# EAGLE board Spectrum_Shield-Panel-v15 (EAGLE 6.6.0), part 1 of 2
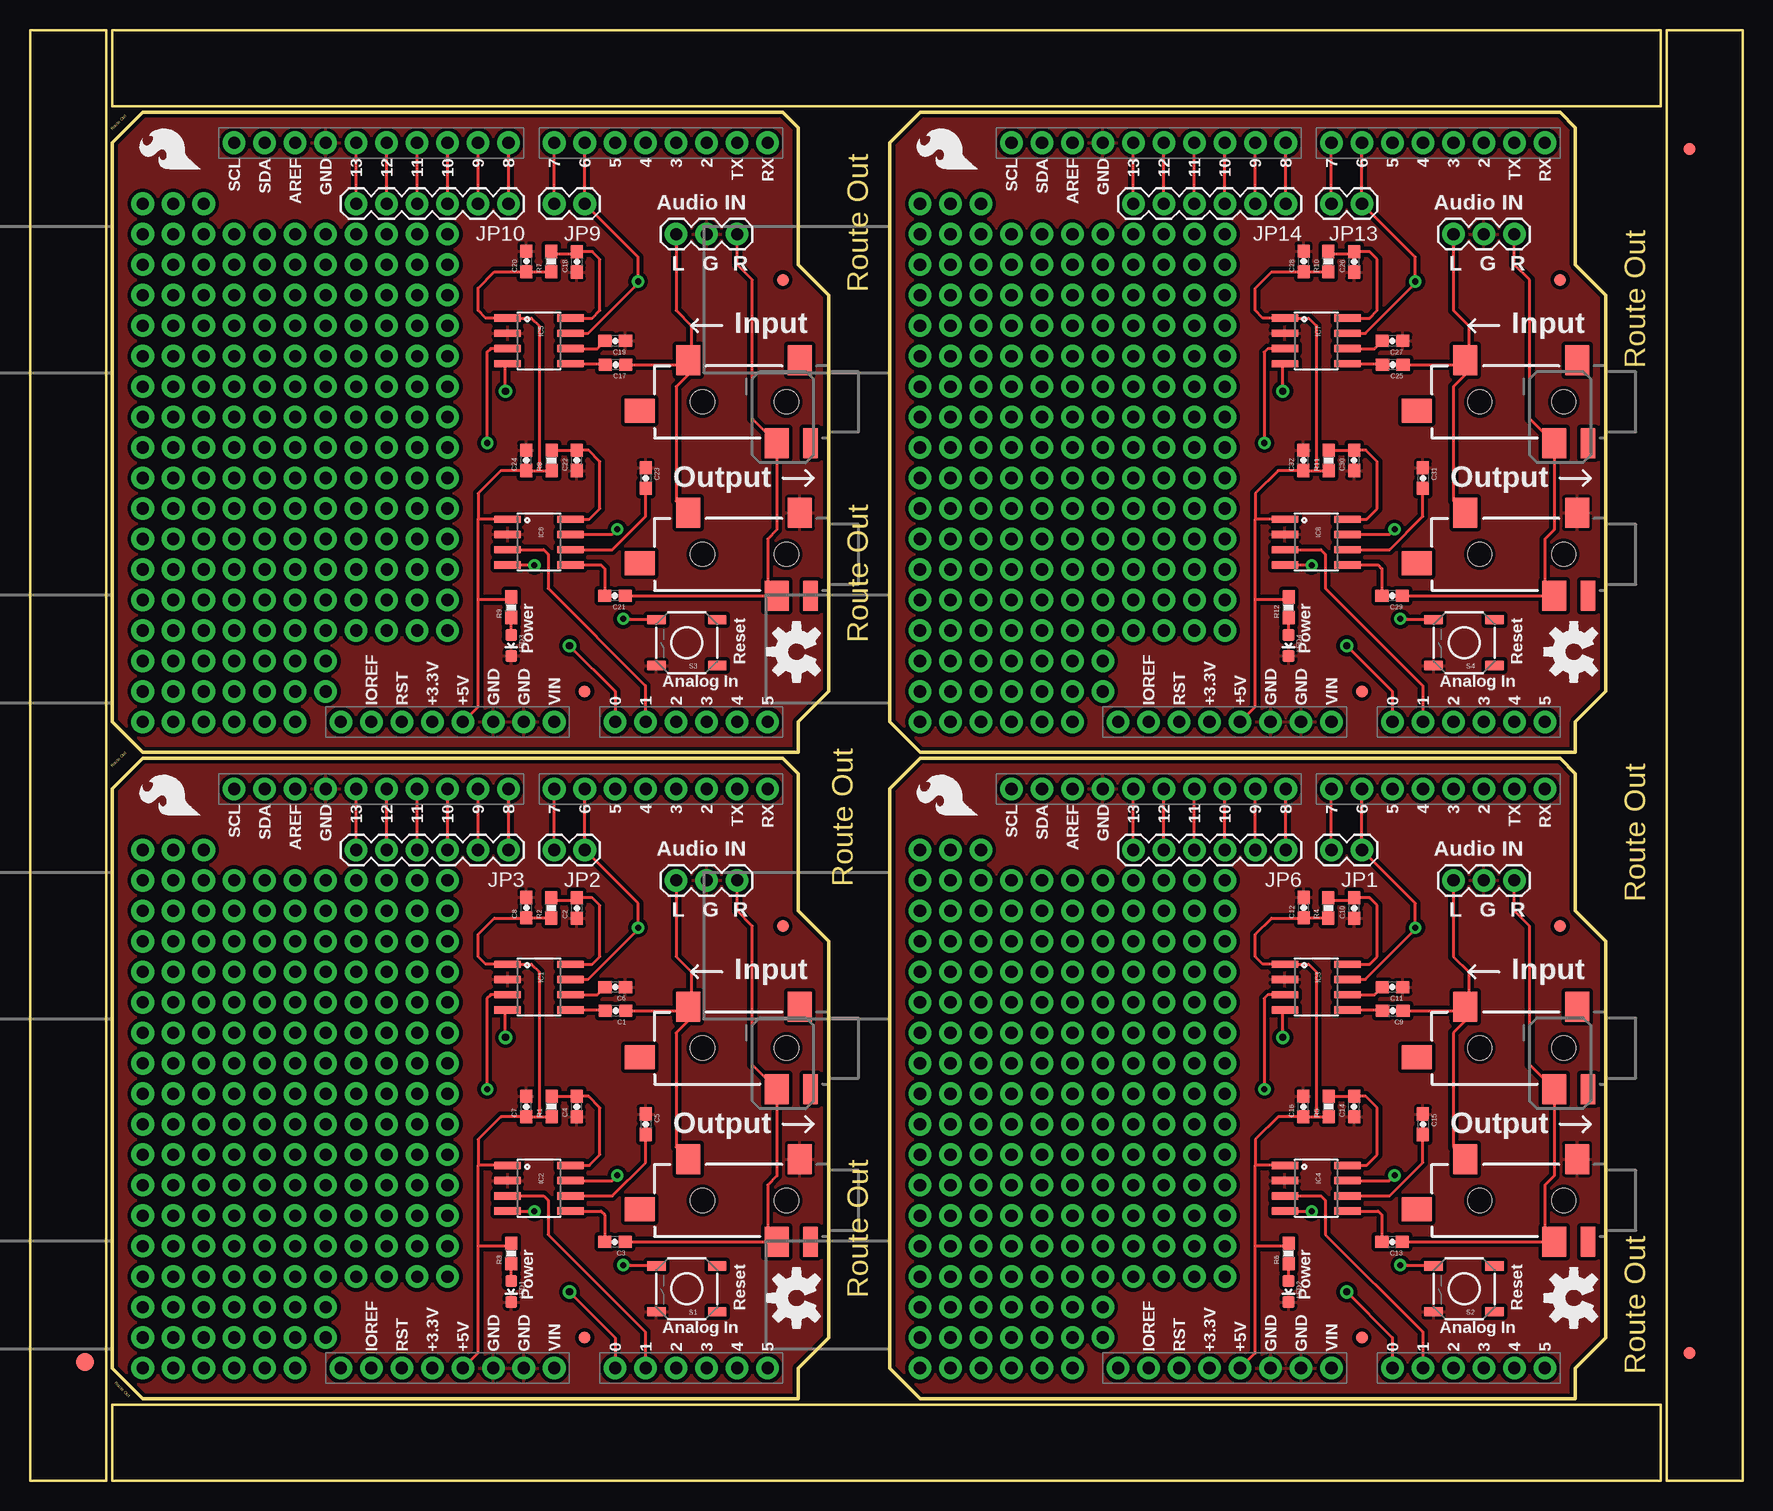
[diagram p0: board, top side]
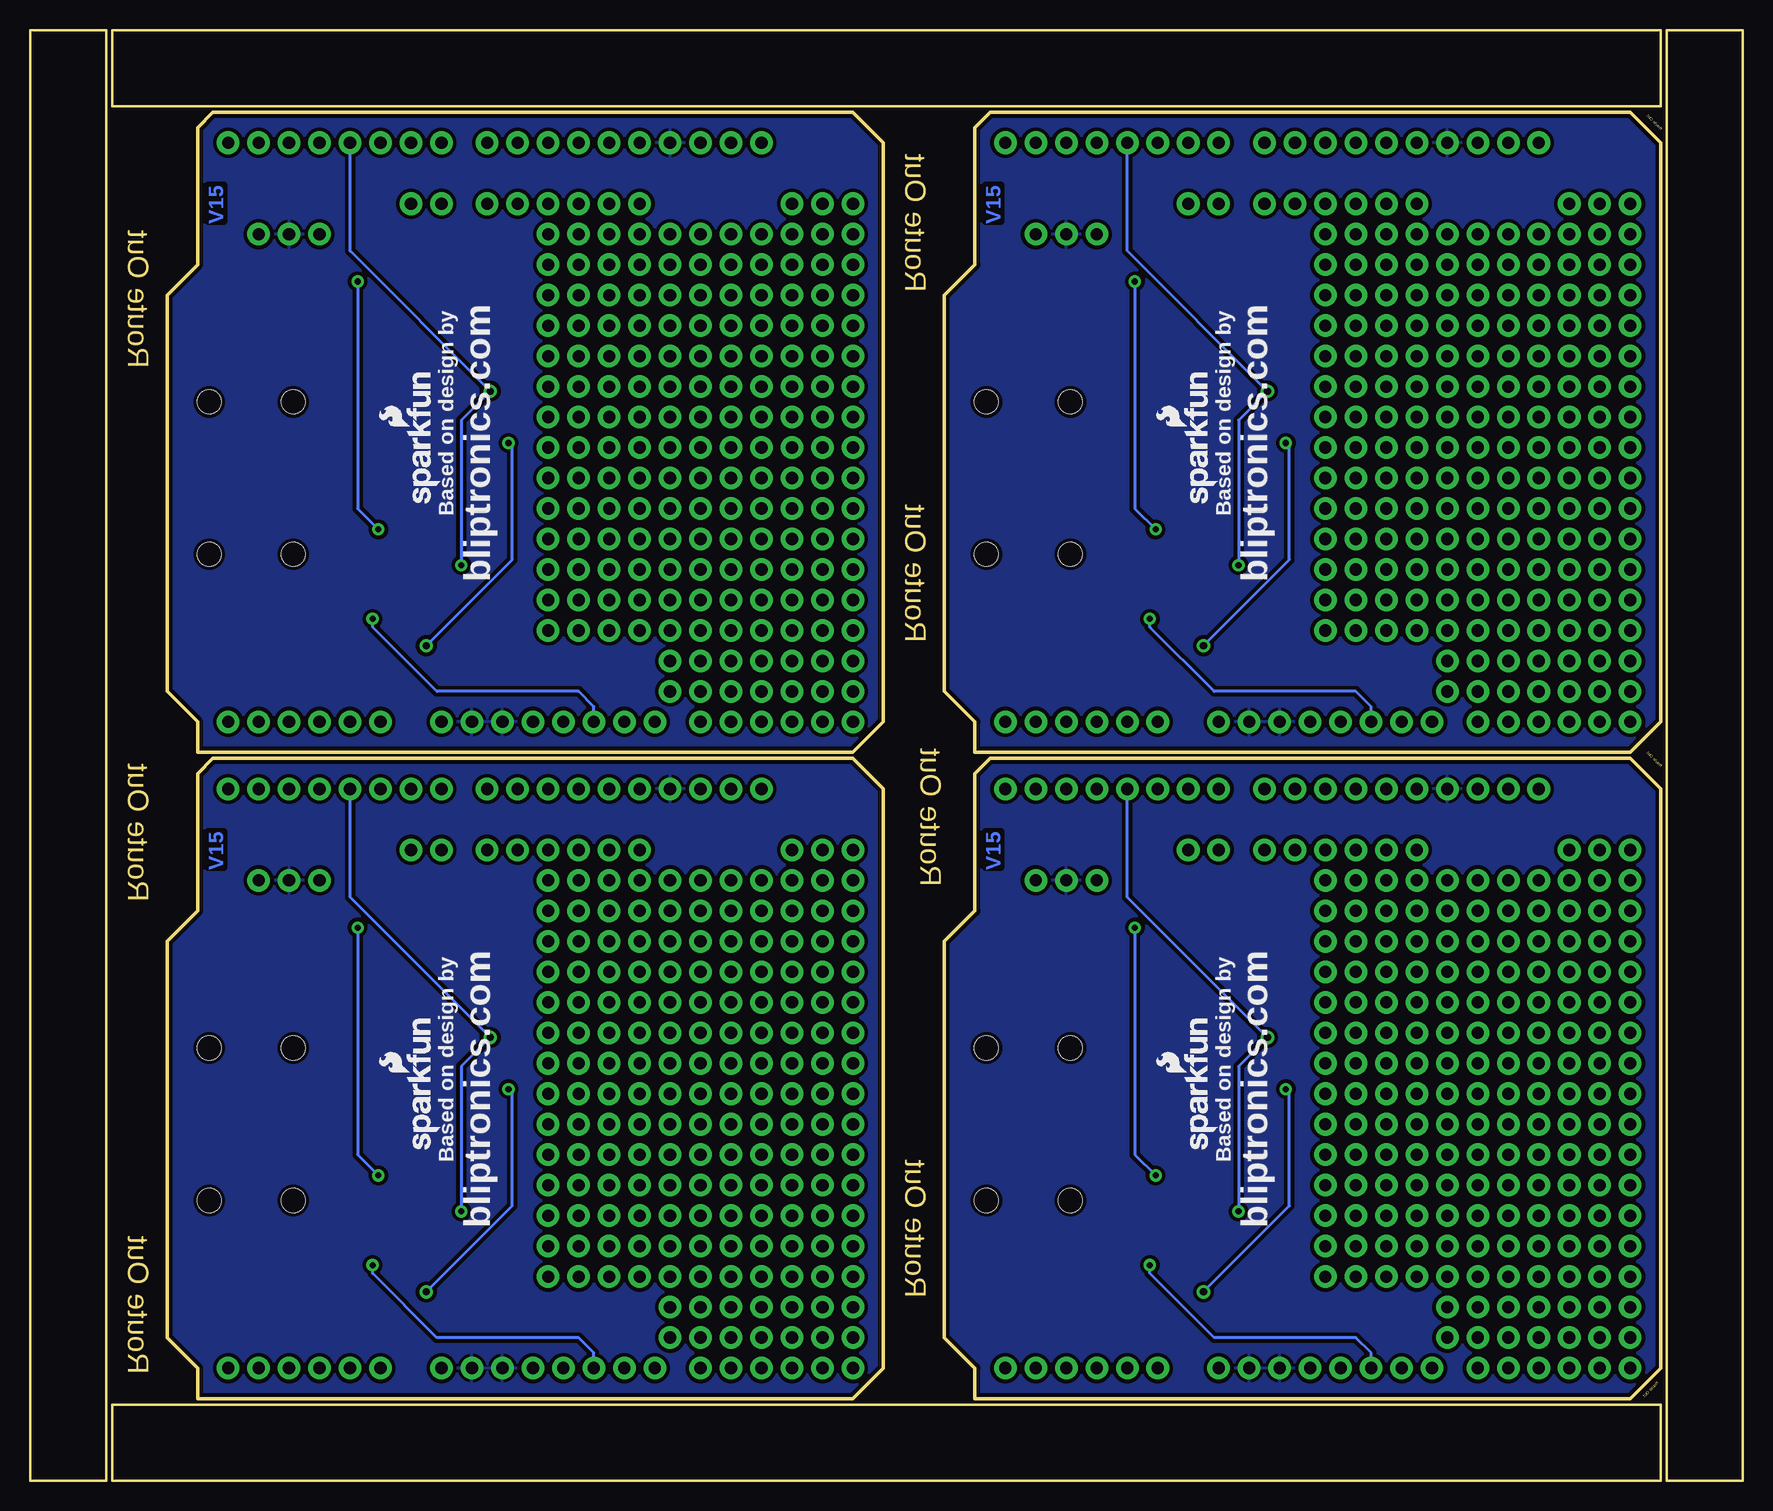
[diagram p1: board, bottom side, seen from below]

Size 142.75 x 120.9 mm. Coordinates in mm from the lower left corner, seen from the top.
Outline: 142.75,72.9 142.75,0 136.4,0 136.4,23.37
Outline: 136.4,22.1 136.4,120.9 142.75,120.9 142.75,71.63
Outline: 9.4,6.86 64.01,6.86 64.01,9.4 66.55,11.94 66.55,44.96 64.01,47.5 64.01,58.93 62.74,60.2 9.4,60.2 6.86,57.66 6.86,9.4 9.4,6.86
Outline: 74.17,6.86 128.78,6.86 128.78,9.4 131.32,11.94 131.32,44.96 128.78,47.5 128.78,58.93 127.51,60.2 74.17,60.2 71.63,57.66 71.63,9.4 74.17,6.86
Outline: 9.4,60.71 64.01,60.71 64.01,63.25 66.55,65.79 66.55,98.81 64.01,101.35 64.01,112.78 62.74,114.05 9.4,114.05 6.86,111.51 6.86,63.25 9.4,60.71
Outline: 74.17,60.71 128.78,60.71 128.78,63.25 131.32,65.79 131.32,98.81 128.78,101.35 128.78,112.78 127.51,114.05 74.17,114.05 71.63,111.51 71.63,63.25 74.17,60.71
Outline: 6.35,0 6.35,120.9 0,120.9 0,0 6.35,0
Outline: 6.86,0 135.89,0 135.89,6.35 6.86,6.35 6.86,0
Outline: 135.89,120.9 6.86,120.9 6.86,114.55 135.89,114.55 135.89,120.9
Copper layers (1*16): Top 0.035mm / dielectric 1.5mm / Bottom 0.035mm
Design rules "SparkFun-2-layer": minimum track width 7mil, minimum drill 15mil, track to track 8mil, track to pad 8mil, pad to pad 8mil, via to via 8mil, smd to smd 8mil, copper to edge 8mil, drill to drill 8mil, minimum pad ring 12mil, minimum via ring 10mil, stop-mask expansion 4mil, vias tented up to drill 20mil, thermal gap 10mil

## Footprints (pad centres in the part's own frame; a part is rotated, then mirrored left to right if it is on the bottom)
1X03 = drill 1.016 pad 1.88: 1 0,0; 2 2.54,0; 3 5.08,0
AUDIO-JACK-3.5MM-SMD = smd 2 x 2.5: RING 4.3,3.45; SLEEVE 2.4,-3.45; TIP 11.7,-3.45 | smd 1.2 x 2.5: RSH 1.5,3.45 | smd 2.5 x 2: TSH 15.75,0.75 | hole 2: 3.5,0; 10.5,0
0603-CAP = smd 1.1 x 1: 1 -0.85,0; 2 0.85,0
FIDUCIAL-1.5X3 = smd 1.5 x 1.5: 1 0,0
FIDUCIAL-1X2 = smd 1 x 1: 1 0,0
SOIC8 = smd 0.61 x 2.21: 1 -1.905,-2.616; 2 -0.635,-2.616; 3 0.635,-2.616; 4 1.905,-2.616; 5 1.905,2.616; 6 0.635,2.616; 7 -0.635,2.616; 8 -1.905,2.616
1X02 = drill 1.016 pad 1.88: 1 0,0; 2 2.54,0
1X06 = drill 1.016 pad 1.88: 1 0,0; 2 2.54,0; 3 5.08,0; 4 7.62,0; 5 10.16,0; 6 12.7,0
LED-0603 = smd 1 x 1: A 0,-0.877; C 0,0.877
0603-RES = smd 1.1 x 1: 1 -0.85,0; 2 0.85,0
TACTILE_SWITCH_SMD = smd 1.524 x 0.762: 1 -2.54,1.905; 2 2.54,1.905; 3 -2.54,-1.905; 4 2.54,-1.905
UNO_R3_SHIELD = drill 1.016 pad 1.88: 3.3V 50.8,26.67; 5V 50.8,29.21; A0 50.8,41.91; A1 50.8,44.45; A2 50.8,46.99; A3 50.8,49.53; A4 50.8,52.07; A5 50.8,54.61; AREF 2.54,15.24; D2 2.54,49.53; D3 2.54,46.99; D4 2.54,44.45; D5 2.54,41.91; D6 2.54,39.37; D7 2.54,36.83; D8 2.54,33.02; D9 2.54,30.48; D10 2.54,27.94; D11 2.54,25.4; D12 2.54,22.86; D13 2.54,20.32; GND@0 50.8,31.75; GND@1 50.8,34.29; GND@2 2.54,17.78; IOREF 50.8,21.59; NC 50.8,19.05; RES 50.8,24.13; RX 2.54,54.61; SCL 2.54,10.16; SDA 2.54,12.7; TX 2.54,52.07; VIN 50.8,36.83

## Placement (x,y rotation side)
AUDIO_IN  JUMPER-3PTH  [1X03]  53.85,50.04 0 top
AUDIO_IN1  JUMPER-3PTH  [1X03]  118.62,50.04 0 top
AUDIO_IN2  JUMPER-3PTH  [1X03]  53.85,103.89 0 top
AUDIO_IN3  JUMPER-3PTH  [1X03]  118.62,103.89 0 top
AUDIOJACK1  [AUDIO-JACK-3.5MM-SMD]  66.55,36.07 180 top
AUDIOJACK2  [AUDIO-JACK-3.5MM-SMD]  66.55,23.37 180 top
AUDIOJACK3  [AUDIO-JACK-3.5MM-SMD]  131.32,36.07 180 top
AUDIOJACK4  [AUDIO-JACK-3.5MM-SMD]  131.32,23.37 180 top
AUDIOJACK5  [AUDIO-JACK-3.5MM-SMD]  66.55,89.92 180 top
AUDIOJACK6  [AUDIO-JACK-3.5MM-SMD]  66.55,77.22 180 top
AUDIOJACK7  [AUDIO-JACK-3.5MM-SMD]  131.32,89.92 180 top
AUDIOJACK8  [AUDIO-JACK-3.5MM-SMD]  131.32,77.22 180 top
C1  1000pF  [0603-CAP]  48.79,39.17 180 top
C2  33pF  [0603-CAP]  45.58,47.73 90 top
C3  1000pF  [0603-CAP]  48.74,19.91 180 top
C4  33pF  [0603-CAP]  45.57,31.19 90 top
C5  0.1uF  [0603-CAP]  51.31,29.72 270 top
C6  0.1uF  [0603-CAP]  48.77,41.15 180 top
C7  0.1uF  [0603-CAP]  41.35,31.19 90 top
C8  0.1uF  [0603-CAP]  41.37,47.76 90 top
C9  1000pF  [0603-CAP]  113.56,39.17 180 top
C10  33pF  [0603-CAP]  110.35,47.73 90 top
C11  0.1uF  [0603-CAP]  113.54,41.15 180 top
C12  0.1uF  [0603-CAP]  106.14,47.76 90 top
C13  1000pF  [0603-CAP]  113.51,19.91 180 top
C14  33pF  [0603-CAP]  110.34,31.19 90 top
C15  0.1uF  [0603-CAP]  116.08,29.72 270 top
C16  0.1uF  [0603-CAP]  106.12,31.19 90 top
C17  1000pF  [0603-CAP]  48.79,93.01 180 top
C18  33pF  [0603-CAP]  45.58,101.58 90 top
C19  0.1uF  [0603-CAP]  48.77,95 180 top
C20  0.1uF  [0603-CAP]  41.37,101.61 90 top
C21  1000pF  [0603-CAP]  48.74,73.76 180 top
C22  33pF  [0603-CAP]  45.57,85.04 90 top
C23  0.1uF  [0603-CAP]  51.31,83.57 270 top
C24  0.1uF  [0603-CAP]  41.35,85.04 90 top
C25  1000pF  [0603-CAP]  113.56,93.01 180 top
C26  33pF  [0603-CAP]  110.35,101.58 90 top
C27  0.1uF  [0603-CAP]  113.54,95 180 top
C28  0.1uF  [0603-CAP]  106.14,101.61 90 top
C29  1000pF  [0603-CAP]  113.51,73.76 180 top
C30  33pF  [0603-CAP]  110.34,85.04 90 top
C31  0.1uF  [0603-CAP]  116.08,83.57 270 top
C32  0.1uF  [0603-CAP]  106.12,85.04 90 top
E$1  [FIDUCIAL-1.5X3]  4.57,9.91 0 top
E$4  [FIDUCIAL-1X2]  138.3,10.67 0 top
E$5  [FIDUCIAL-1X2]  138.3,111 180 top
IC1  MSGEQ7SOIC  [SOIC8]  42.42,41.15 270 top
IC2  MSGEQ7SOIC  [SOIC8]  42.42,24.38 270 top
IC3  MSGEQ7SOIC  [SOIC8]  107.19,41.15 270 top
IC4  MSGEQ7SOIC  [SOIC8]  107.19,24.38 270 top
IC5  MSGEQ7SOIC  [SOIC8]  42.42,95 270 top
IC6  MSGEQ7SOIC  [SOIC8]  42.42,78.23 270 top
IC7  MSGEQ7SOIC  [SOIC8]  107.19,95 270 top
IC8  MSGEQ7SOIC  [SOIC8]  107.19,78.23 270 top
JP1  [1X02]  111,52.58 180 top
JP2  [1X02]  46.23,52.58 180 top
JP3  [1X06]  39.88,52.58 180 top
JP4  FIDUCIAL1X2  [FIDUCIAL-1X2]  46.23,11.94 0 top
JP5  FIDUCIAL1X2  [FIDUCIAL-1X2]  62.74,46.23 0 top
JP6  [1X06]  104.65,52.58 180 top
JP7  FIDUCIAL1X2  [FIDUCIAL-1X2]  111,11.94 0 top
JP8  FIDUCIAL1X2  [FIDUCIAL-1X2]  127.51,46.23 0 top
JP9  [1X02]  46.23,106.43 180 top
JP10  [1X06]  39.88,106.43 180 top
JP11  FIDUCIAL1X2  [FIDUCIAL-1X2]  46.23,65.79 0 top
JP12  FIDUCIAL1X2  [FIDUCIAL-1X2]  62.74,100.08 0 top
JP13  [1X02]  111,106.43 180 top
JP14  [1X06]  104.65,106.43 180 top
JP15  FIDUCIAL1X2  [FIDUCIAL-1X2]  111,65.79 0 top
JP16  FIDUCIAL1X2  [FIDUCIAL-1X2]  127.51,100.08 0 top
LED1  RED  [LED-0603]  40.11,15.77 180 top
LED2  RED  [LED-0603]  104.88,15.77 180 top
LED3  RED  [LED-0603]  40.11,69.62 180 top
LED4  RED  [LED-0603]  104.88,69.62 180 top
LOGO1  OSHW-LOGOM  [OSHW-LOGO-M]  63.88,15.24 90 top
LOGO2  SFE_LOGO_FLAME.2_INCH  [SFE_LOGO_FLAME_.2]  14.48,55.12 90 top
LOGO3  SFE_LOGO_NAME_FLAME.1_INCH  [SFE_LOGO_NAME_FLAME_.1]  43.69,27.18 90 bottom
LOGO4  OSHW-LOGOM  [OSHW-LOGO-M]  128.65,15.24 90 top
LOGO5  SFE_LOGO_FLAME.2_INCH  [SFE_LOGO_FLAME_.2]  79.25,55.12 90 top
LOGO6  SFE_LOGO_NAME_FLAME.1_INCH  [SFE_LOGO_NAME_FLAME_.1]  108.46,27.18 90 bottom
LOGO7  OSHW-LOGOM  [OSHW-LOGO-M]  63.88,69.09 90 top
LOGO8  SFE_LOGO_FLAME.2_INCH  [SFE_LOGO_FLAME_.2]  14.48,108.97 90 top
LOGO9  SFE_LOGO_NAME_FLAME.1_INCH  [SFE_LOGO_NAME_FLAME_.1]  43.69,81.03 90 bottom
LOGO10  OSHW-LOGOM  [OSHW-LOGO-M]  128.65,69.09 90 top
LOGO11  SFE_LOGO_FLAME.2_INCH  [SFE_LOGO_FLAME_.2]  79.25,108.97 90 top
LOGO12  SFE_LOGO_NAME_FLAME.1_INCH  [SFE_LOGO_NAME_FLAME_.1]  108.46,81.03 90 bottom
R1  200k  [0603-RES]  43.46,31.19 90 top
R2  200k  [0603-RES]  43.43,47.75 90 top
R3  330  [0603-RES]  40.11,18.95 90 top
R4  200k  [0603-RES]  108.2,47.75 90 top
R5  200k  [0603-RES]  108.23,31.19 90 top
R6  330  [0603-RES]  104.88,18.95 90 top
R7  200k  [0603-RES]  43.43,101.6 90 top
R8  200k  [0603-RES]  43.46,85.04 90 top
R9  330  [0603-RES]  40.11,72.8 90 top
R10  200k  [0603-RES]  108.2,101.6 90 top
R11  200k  [0603-RES]  108.23,85.04 90 top
R12  330  [0603-RES]  104.88,72.8 90 top
S1  [TACTILE_SWITCH_SMD]  54.74,16 180 top
S2  [TACTILE_SWITCH_SMD]  119.51,16 180 top
S3  [TACTILE_SWITCH_SMD]  54.74,69.85 180 top
S4  [TACTILE_SWITCH_SMD]  119.51,69.85 180 top
U1  ARDUINO_R3_SHIELD  [UNO_R3_SHIELD]  6.86,60.2 270 top
U2  ARDUINO_R3_SHIELD  [UNO_R3_SHIELD]  71.63,60.2 270 top
U3  ARDUINO_R3_SHIELD  [UNO_R3_SHIELD]  6.86,114.05 270 top
U4  ARDUINO_R3_SHIELD  [UNO_R3_SHIELD]  71.63,114.05 270 top

## Library data of the parts
AUDIO_IN AUDIO_IN1-AUDIO_IN3 IC1-IC8 JP1-JP16 S1-S4 = SparkFun
AUDIOJACK1-AUDIOJACK8 = SparkFun-Connectors; PROD_ID: CONN-10353
C1-C4 C9 C10 C13 C14 C17 C18 C21 C22 C25 C26 C29 C30 = SparkFun-Capacitors
C5-C8 C11 C12 C15 C16 C19 C20 C23 C24 C27 C28 C31 C32 = SparkFun-Capacitors; PROD_ID: CAP-00810
E$1 = SparkFun-Retired
E$4 E$5 LOGO1-LOGO12 = SparkFun-Aesthetics
LED1-LED4 = SparkFun-LED; PROD_ID: DIO-00819
R1 R5 R8 R11 = SparkFun-Resistors; PROD_ID: RES-09385
R2 R4 R7 R10 = SparkFun-Resistors; PROD_ID: RES-08969
R3 R6 R9 R12 = SparkFun-Resistors; PROD_ID: RES-00818
U1-U4 = SparkFun-Boards

## Nets
ANALOG0: IC1.3 U1.A0
ANALOG1: IC2.3 U1.A1
ANALOG2: IC3.3 U2.A0
ANALOG3: IC4.3 U2.A1
ANALOG4: IC5.3 U3.A0
ANALOG5: IC6.3 U3.A1
ANALOG6: IC7.3 U4.A0
ANALOG7: IC8.3 U4.A1
GND: AUDIO_IN.2 AUDIOJACK2.SLEEVE C2.1 C4.1 C5.1 C6.1 C7.2 C8.2 IC1.2 IC2.2 LED1.C S1.2 U1.GND@0 U1.GND@1 U1.GND@2
GND1: AUDIO_IN1.2 AUDIOJACK4.SLEEVE C10.1 C11.1 C12.2 C14.1 C15.1 C16.2 IC3.2 IC4.2 LED2.C S2.2 U2.GND@0 U2.GND@1 U2.GND@2
GND2: AUDIO_IN2.2 AUDIOJACK6.SLEEVE C18.1 C19.1 C20.2 C22.1 C23.1 C24.2 IC5.2 IC6.2 LED3.C S3.2 U3.GND@0 U3.GND@1 U3.GND@2
GND3: AUDIO_IN3.2 AUDIOJACK8.SLEEVE C26.1 C27.1 C28.2 C30.1 C31.1 C32.2 IC7.2 IC8.2 LED4.C S4.2 U4.GND@0 U4.GND@1 U4.GND@2
LEFT: AUDIO_IN.1 AUDIOJACK1.TIP AUDIOJACK2.TIP C1.1
LEFT1: AUDIO_IN1.1 AUDIOJACK3.TIP AUDIOJACK4.TIP C9.1
LEFT2: AUDIO_IN2.1 AUDIOJACK5.TIP AUDIOJACK6.TIP C17.1
LEFT3: AUDIO_IN3.1 AUDIOJACK7.TIP AUDIOJACK8.TIP C25.1
N$1: C1.2 IC1.5
N$2: C3.2 IC2.5
N$3: C4.2 IC2.8 R1.2
N$4: C2.2 IC1.8 R2.2
N$5: C5.2 IC2.6
N$6: C6.2 IC1.6
N$7: LED1.A R3.1
N$8: C9.2 IC3.5
N$9: JP2.2 U1.D7
N$10: JP3.1 U1.D8
N$11: JP3.2 U1.D9
N$12: JP3.3 U1.D10
N$13: JP3.4 U1.D11
N$14: JP3.5 U1.D12
N$15: JP3.6 U1.D13
N$134: C10.2 IC3.8 R4.2
N$149: C11.2 IC3.6
N$150: C13.2 IC4.5
N$151: C14.2 IC4.8 R5.2
N$197: C15.2 IC4.6
N$198: LED2.A R6.1
N$199: JP1.2 U2.D7
N$200: JP6.1 U2.D8
N$201: JP6.2 U2.D9
N$202: JP6.3 U2.D10
N$203: JP6.4 U2.D11
N$204: JP6.5 U2.D12
N$205: JP6.6 U2.D13
N$227: S1.4 U1.RES
N$384: S2.4 U2.RES
N$385: C17.2 IC5.5
N$386: C18.2 IC5.8 R7.2
N$387: C19.2 IC5.6
N$388: C21.2 IC6.5
N$389: C22.2 IC6.8 R8.2
N$390: C23.2 IC6.6
N$391: LED3.A R9.1
N$392: JP9.2 U3.D7
N$393: JP10.1 U3.D8
N$394: JP10.2 U3.D9
N$395: JP10.3 U3.D10
N$396: JP10.4 U3.D11
N$397: JP10.5 U3.D12
N$398: JP10.6 U3.D13
N$576: S3.4 U3.RES
N$577: C25.2 IC7.5
N$578: C26.2 IC7.8 R10.2
N$579: C27.2 IC7.6
N$580: C29.2 IC8.5
N$581: C30.2 IC8.8 R11.2
N$582: C31.2 IC8.6
N$583: LED4.A R12.1
N$584: JP13.2 U4.D7
N$585: JP14.1 U4.D8
N$586: JP14.2 U4.D9
N$587: JP14.3 U4.D10
N$588: JP14.4 U4.D11
N$589: JP14.5 U4.D12
N$590: JP14.6 U4.D13
N$768: S4.4 U4.RES
RESET: IC1.7 IC2.7 JP2.1 U1.D6
RESET1: IC3.7 IC4.7 JP1.1 U2.D6
RESET2: IC5.7 IC6.7 JP9.1 U3.D6
RESET3: IC7.7 IC8.7 JP13.1 U4.D6
RIGHT: AUDIO_IN.3 AUDIOJACK1.RING AUDIOJACK2.RING C3.1
RIGHT1: AUDIO_IN1.3 AUDIOJACK3.RING AUDIOJACK4.RING C13.1
RIGHT2: AUDIO_IN2.3 AUDIOJACK5.RING AUDIOJACK6.RING C21.1
RIGHT3: AUDIO_IN3.3 AUDIOJACK7.RING AUDIOJACK8.RING C29.1
STROBE: IC1.4 IC2.4 U1.D4
STROBE1: IC3.4 IC4.4 U2.D4
STROBE2: IC5.4 IC6.4 U3.D4
STROBE3: IC7.4 IC8.4 U4.D4
VCC: C7.1 C8.1 IC1.1 IC2.1 R1.1 R2.1 R3.2 U1.5V
VCC1: C12.1 C16.1 IC3.1 IC4.1 R4.1 R5.1 R6.2 U2.5V
VCC2: C20.1 C24.1 IC5.1 IC6.1 R7.1 R8.1 R9.2 U3.5V
VCC3: C28.1 C32.1 IC7.1 IC8.1 R10.1 R11.1 R12.2 U4.5V

## Tracks (layer width: path | path; a pad name or v marks a point on that pad's centre or on a via)
ANALOG0  (via drill 0.51, 0.6)
  Top 0.254: IC1.3 38.38,40.51 38.08,40.21 38.08,32.66 v38.1,32.64 | v44.96,15.75 48.77,11.94 U1.A0
  Bottom 0.254: v44.96,15.75 37.8,22.91 37.8,32.33 v38.1,32.64
ANALOG1
  Top 0.254: IC2.3 42.8,23.75 43.18,23.37 43.18,20.52 51.28,12.42 51.28,9.42 U1.A1
ANALOG2  (via drill 0.51, 0.6)
  Top 0.254: IC3.3 103.15,40.51 102.84,40.21 102.84,32.66 v102.87,32.64 | v109.73,15.75 113.54,11.94 U2.A0
  Bottom 0.254: v109.73,15.75 102.56,22.91 102.56,32.33 v102.87,32.64
ANALOG3
  Top 0.254: IC4.3 107.57,23.75 107.95,23.37 107.95,20.52 116.05,12.42 116.05,9.42 U2.A1
ANALOG4  (via drill 0.51, 0.6)
  Top 0.254: IC5.3 38.38,94.36 38.08,94.06 38.08,86.51 v38.1,86.49 | v44.96,69.6 48.77,65.79 U3.A0
  Bottom 0.254: v44.96,69.6 37.8,76.76 37.8,86.18 v38.1,86.49
ANALOG5
  Top 0.254: IC6.3 42.8,77.6 43.18,77.22 43.18,74.37 51.28,66.27 51.28,63.27 U3.A1
ANALOG6  (via drill 0.51, 0.6)
  Top 0.254: IC7.3 103.15,94.36 102.84,94.06 102.84,86.51 v102.87,86.49 | v109.73,69.6 113.54,65.79 U4.A0
  Bottom 0.254: v109.73,69.6 102.56,76.76 102.56,86.18 v102.87,86.49
ANALOG7
  Top 0.254: IC8.3 107.57,77.6 107.95,77.22 107.95,74.37 116.05,66.27 116.05,63.27 U4.A1
GND
  pour Top (isolate 0.305): 9.4,6.86 64.01,6.86 64.01,9.4 66.55,11.94 66.55,44.96 64.01,47.5 64.01,58.93 62.74,60.2 9.4,60.2 6.86,57.66 6.86,9.4
  pour Bottom (isolate 0.305): 9.4,60.2 6.86,57.66 6.86,9.4 9.4,6.86 64.01,6.86 64.01,9.4 66.55,11.94 66.55,44.96 64.01,47.5 64.01,58.93 62.74,60.2
GND1
  pour Top (isolate 0.305): 74.17,6.86 128.78,6.86 128.78,9.4 131.32,11.94 131.32,44.96 128.78,47.5 128.78,58.93 127.51,60.2 74.17,60.2 71.63,57.66 71.63,9.4
  pour Bottom (isolate 0.305): 74.17,60.2 71.63,57.66 71.63,9.4 74.17,6.86 128.78,6.86 128.78,9.4 131.32,11.94 131.32,44.96 128.78,47.5 128.78,58.93 127.51,60.2
GND2
  pour Top (isolate 0.305): 9.4,60.71 64.01,60.71 64.01,63.25 66.55,65.79 66.55,98.81 64.01,101.35 64.01,112.78 62.74,114.05 9.4,114.05 6.86,111.51 6.86,63.25
  pour Bottom (isolate 0.305): 9.4,114.05 6.86,111.51 6.86,63.25 9.4,60.71 64.01,60.71 64.01,63.25 66.55,65.79 66.55,98.81 64.01,101.35 64.01,112.78 62.74,114.05
GND3
  pour Top (isolate 0.305): 74.17,60.71 128.78,60.71 128.78,63.25 131.32,65.79 131.32,98.81 128.78,101.35 128.78,112.78 127.51,114.05 74.17,114.05 71.63,111.51 71.63,63.25
  pour Bottom (isolate 0.305): 74.17,114.05 71.63,111.51 71.63,63.25 74.17,60.71 128.78,60.71 128.78,63.25 131.32,65.79 131.32,98.81 128.78,101.35 128.78,112.78 127.51,114.05
LEFT
  Top 0.254: AUDIO_IN.1 53.85,43.69 55.12,42.42 55.12,39.79 AUDIOJACK1.TIP | 53.94,38.61 AUDIOJACK1.TIP | AUDIOJACK1.TIP 54.85,38.34 53.85,37.34 53.85,27.82 AUDIOJACK2.TIP | C1.1 54.5,39.17 AUDIOJACK1.TIP
LEFT1
  Top 0.254: AUDIO_IN1.1 118.62,43.69 119.89,42.42 119.89,39.79 AUDIOJACK3.TIP | 118.71,38.61 AUDIOJACK3.TIP | AUDIOJACK3.TIP 119.62,38.34 118.62,37.34 118.62,27.82 AUDIOJACK4.TIP | C9.1 119.27,39.17 AUDIOJACK3.TIP
LEFT2
  Top 0.254: AUDIO_IN2.1 53.85,97.54 55.12,96.27 55.12,93.64 AUDIOJACK5.TIP | 53.94,92.46 AUDIOJACK5.TIP | AUDIOJACK5.TIP 54.85,92.19 53.85,91.19 53.85,81.67 AUDIOJACK6.TIP | C17.1 54.5,93.02 AUDIOJACK5.TIP
LEFT3
  Top 0.254: AUDIO_IN3.1 118.62,97.54 119.89,96.27 119.89,93.64 AUDIOJACK7.TIP | 118.71,92.46 AUDIOJACK7.TIP | AUDIOJACK7.TIP 119.62,92.19 118.62,91.19 118.62,81.67 AUDIOJACK8.TIP | C25.1 119.27,93.02 AUDIOJACK7.TIP
N$1
  Top 0.254: IC1.5 47.87,39.24 C1.2
N$2
  Top 0.254: IC2.5 47.57,22.48 47.88,22.17 47.88,19.93 C3.2
N$3
  Top 0.254: IC2.8 46.61,26.29 47.5,27.18 47.5,31.09 46.55,32.04 C4.2 R1.2
N$4
  Top 0.254: R2.2 43.63,48.4 45.4,48.4 C2.2 46.86,48.58 47.5,47.95 47.5,43.69 46.86,43.05 IC1.8
N$5
  Top 0.254: IC2.6 48.54,23.75 51.31,26.52 C5.2
N$6
  Top 0.254: IC1.6 47.28,40.51 C6.2
N$7
  Top 0.254: LED1.A R3.1
N$8
  Top 0.254: IC3.5 112.64,39.24 C9.2
N$9
  Top 0.254: JP2.2 U1.D7
N$10
  Top 0.254: JP3.1 U1.D8
N$11
  Top 0.254: JP3.2 U1.D9
N$12
  Top 0.254: JP3.3 U1.D10
N$13
  Top 0.254: JP3.4 U1.D11
N$14
  Top 0.254: JP3.5 U1.D12
N$15
  Top 0.254: JP3.6 U1.D13
N$16  (via drill 1.02 pad 1.88)
  other vias: 9.4,50.04
N$17  (via drill 1.02 pad 1.88)
  other vias: 9.4,47.5
N$18  (via drill 1.02 pad 1.88)
  other vias: 9.4,44.96
N$19  (via drill 1.02 pad 1.88)
  other vias: 9.4,42.42
N$20  (via drill 1.02 pad 1.88)
  other vias: 9.4,39.88
N$21  (via drill 1.02 pad 1.88)
  other vias: 9.4,37.34
N$22  (via drill 1.02 pad 1.88)
  other vias: 9.4,34.8
N$23  (via drill 1.02 pad 1.88)
  other vias: 9.4,32.26
N$24  (via drill 1.02 pad 1.88)
  other vias: 9.4,29.72
N$25  (via drill 1.02 pad 1.88)
  other vias: 9.4,27.18
N$26  (via drill 1.02 pad 1.88)
  other vias: 9.4,24.64
N$27  (via drill 1.02 pad 1.88)
  other vias: 9.4,22.1
N$28  (via drill 1.02 pad 1.88)
  other vias: 9.4,19.56
N$29  (via drill 1.02 pad 1.88)
  other vias: 9.4,17.02
N$30  (via drill 1.02 pad 1.88)
  other vias: 9.4,14.48
N$31  (via drill 1.02 pad 1.88)
  other vias: 9.4,11.94
N$32  (via drill 1.02 pad 1.88)
  other vias: 9.4,9.4
N$33  (via drill 1.02 pad 1.88)
  other vias: 11.94,50.04
N$34  (via drill 1.02 pad 1.88)
  other vias: 11.94,47.5
N$35  (via drill 1.02 pad 1.88)
  other vias: 11.94,44.96
N$36  (via drill 1.02 pad 1.88)
  other vias: 11.94,42.42
N$37  (via drill 1.02 pad 1.88)
  other vias: 11.94,39.88
N$38  (via drill 1.02 pad 1.88)
  other vias: 11.94,37.34
N$39  (via drill 1.02 pad 1.88)
  other vias: 11.94,34.8
N$40  (via drill 1.02 pad 1.88)
  other vias: 11.94,32.26
N$41  (via drill 1.02 pad 1.88)
  other vias: 11.94,29.72
N$42  (via drill 1.02 pad 1.88)
  other vias: 11.94,27.18
N$43  (via drill 1.02 pad 1.88)
  other vias: 11.94,24.64
N$44  (via drill 1.02 pad 1.88)
  other vias: 11.94,22.1
N$45  (via drill 1.02 pad 1.88)
  other vias: 11.94,19.56
N$46  (via drill 1.02 pad 1.88)
  other vias: 11.94,17.02
N$47  (via drill 1.02 pad 1.88)
  other vias: 11.94,14.48
N$48  (via drill 1.02 pad 1.88)
  other vias: 11.94,11.94
N$49  (via drill 1.02 pad 1.88)
  other vias: 11.94,9.4
N$50  (via drill 1.02 pad 1.88)
  other vias: 14.48,50.04
N$51  (via drill 1.02 pad 1.88)
  other vias: 14.48,47.5
N$52  (via drill 1.02 pad 1.88)
  other vias: 14.48,44.96
N$53  (via drill 1.02 pad 1.88)
  other vias: 14.48,42.42
N$54  (via drill 1.02 pad 1.88)
  other vias: 14.48,39.88
N$55  (via drill 1.02 pad 1.88)
  other vias: 14.48,37.34
N$56  (via drill 1.02 pad 1.88)
  other vias: 14.48,34.8
N$57  (via drill 1.02 pad 1.88)
  other vias: 14.48,32.26
N$58  (via drill 1.02 pad 1.88)
  other vias: 14.48,29.72
N$59  (via drill 1.02 pad 1.88)
  other vias: 14.48,27.18
N$60  (via drill 1.02 pad 1.88)
  other vias: 14.48,24.64
N$61  (via drill 1.02 pad 1.88)
  other vias: 14.48,22.1
N$62  (via drill 1.02 pad 1.88)
  other vias: 14.48,19.56
N$63  (via drill 1.02 pad 1.88)
  other vias: 14.48,17.02
N$64  (via drill 1.02 pad 1.88)
  other vias: 14.48,14.48
N$65  (via drill 1.02 pad 1.88)
  other vias: 14.48,11.94
N$66  (via drill 1.02 pad 1.88)
  other vias: 14.48,9.4
N$67  (via drill 1.02 pad 1.88)
  other vias: 17.02,50.04
N$68  (via drill 1.02 pad 1.88)
  other vias: 17.02,47.5
N$69  (via drill 1.02 pad 1.88)
  other vias: 17.02,44.96
N$70  (via drill 1.02 pad 1.88)
  other vias: 17.02,42.42
N$71  (via drill 1.02 pad 1.88)
  other vias: 17.02,39.88
N$72  (via drill 1.02 pad 1.88)
  other vias: 17.02,37.34
N$73  (via drill 1.02 pad 1.88)
  other vias: 17.02,34.8
N$74  (via drill 1.02 pad 1.88)
  other vias: 17.02,32.26
N$75  (via drill 1.02 pad 1.88)
  other vias: 17.02,29.72
N$76  (via drill 1.02 pad 1.88)
  other vias: 17.02,27.18
N$77  (via drill 1.02 pad 1.88)
  other vias: 17.02,24.64
N$78  (via drill 1.02 pad 1.88)
  other vias: 17.02,22.1
N$79  (via drill 1.02 pad 1.88)
  other vias: 17.02,19.56
N$80  (via drill 1.02 pad 1.88)
  other vias: 17.02,17.02
N$81  (via drill 1.02 pad 1.88)
  other vias: 17.02,14.48
N$82  (via drill 1.02 pad 1.88)
  other vias: 17.02,11.94
N$83  (via drill 1.02 pad 1.88)
  other vias: 17.02,9.4
N$84  (via drill 1.02 pad 1.88)
  other vias: 19.56,50.04
N$85  (via drill 1.02 pad 1.88)
  other vias: 19.56,47.5
N$86  (via drill 1.02 pad 1.88)
  other vias: 19.56,44.96
N$87  (via drill 1.02 pad 1.88)
  other vias: 19.56,42.42
N$88  (via drill 1.02 pad 1.88)
  other vias: 19.56,39.88
N$89  (via drill 1.02 pad 1.88)
  other vias: 19.56,37.34
N$90  (via drill 1.02 pad 1.88)
  other vias: 19.56,34.8
N$91  (via drill 1.02 pad 1.88)
  other vias: 19.56,32.26
N$92  (via drill 1.02 pad 1.88)
  other vias: 19.56,29.72
N$93  (via drill 1.02 pad 1.88)
  other vias: 19.56,27.18
N$94  (via drill 1.02 pad 1.88)
  other vias: 19.56,24.64
N$95  (via drill 1.02 pad 1.88)
  other vias: 19.56,22.1
N$96  (via drill 1.02 pad 1.88)
  other vias: 19.56,19.56
N$97  (via drill 1.02 pad 1.88)
  other vias: 19.56,17.02
N$98  (via drill 1.02 pad 1.88)
  other vias: 19.56,14.48
N$99  (via drill 1.02 pad 1.88)
  other vias: 19.56,11.94
N$100  (via drill 1.02 pad 1.88)
  other vias: 19.56,9.4
N$101  (via drill 1.02 pad 1.88)
  other vias: 22.1,50.04
N$102  (via drill 1.02 pad 1.88)
  other vias: 22.1,47.5
N$103  (via drill 1.02 pad 1.88)
  other vias: 22.1,44.96
N$104  (via drill 1.02 pad 1.88)
  other vias: 22.1,42.42
N$105  (via drill 1.02 pad 1.88)
  other vias: 22.1,39.88
N$106  (via drill 1.02 pad 1.88)
  other vias: 22.1,37.34
N$107  (via drill 1.02 pad 1.88)
  other vias: 22.1,34.8
N$108  (via drill 1.02 pad 1.88)
  other vias: 22.1,32.26
N$109  (via drill 1.02 pad 1.88)
  other vias: 22.1,29.72
N$110  (via drill 1.02 pad 1.88)
  other vias: 22.1,27.18
N$111  (via drill 1.02 pad 1.88)
  other vias: 22.1,24.64
N$112  (via drill 1.02 pad 1.88)
  other vias: 22.1,22.1
N$113  (via drill 1.02 pad 1.88)
  other vias: 22.1,19.56
N$114  (via drill 1.02 pad 1.88)
  other vias: 22.1,17.02
N$115  (via drill 1.02 pad 1.88)
  other vias: 22.1,14.48
N$116  (via drill 1.02 pad 1.88)
  other vias: 22.1,11.94
N$117  (via drill 1.02 pad 1.88)
  other vias: 22.1,9.4
N$118  (via drill 1.02 pad 1.88)
  other vias: 24.64,50.04
N$119  (via drill 1.02 pad 1.88)
  other vias: 24.64,47.5
N$120  (via drill 1.02 pad 1.88)
  other vias: 24.64,44.96
N$121  (via drill 1.02 pad 1.88)
  other vias: 24.64,42.42
N$122  (via drill 1.02 pad 1.88)
  other vias: 24.64,39.88
N$123  (via drill 1.02 pad 1.88)
  other vias: 24.64,37.34
N$124  (via drill 1.02 pad 1.88)
  other vias: 24.64,34.8
N$125  (via drill 1.02 pad 1.88)
  other vias: 24.64,32.26
N$126  (via drill 1.02 pad 1.88)
  other vias: 24.64,29.72
N$127  (via drill 1.02 pad 1.88)
  other vias: 24.64,27.18
N$128  (via drill 1.02 pad 1.88)
  other vias: 24.64,24.64
N$129  (via drill 1.02 pad 1.88)
  other vias: 24.64,22.1
N$130  (via drill 1.02 pad 1.88)
  other vias: 24.64,19.56
N$131  (via drill 1.02 pad 1.88)
  other vias: 24.64,17.02
N$132  (via drill 1.02 pad 1.88)
  other vias: 24.64,14.48
N$133  (via drill 1.02 pad 1.88)
  other vias: 24.64,11.94
N$134
  Top 0.254: R4.2 108.4,48.4 110.17,48.4 C10.2 111.63,48.58 112.27,47.95 112.27,43.69 111.63,43.05 IC3.8
N$135  (via drill 1.02 pad 1.88)
  other vias: 27.18,50.04
N$136  (via drill 1.02 pad 1.88)
  other vias: 27.18,47.5
N$137  (via drill 1.02 pad 1.88)
  other vias: 27.18,44.96
N$138  (via drill 1.02 pad 1.88)
  other vias: 27.18,42.42
N$139  (via drill 1.02 pad 1.88)
  other vias: 27.18,39.88
N$140  (via drill 1.02 pad 1.88)
  other vias: 27.18,37.34
N$141  (via drill 1.02 pad 1.88)
  other vias: 27.18,34.8
N$142  (via drill 1.02 pad 1.88)
  other vias: 27.18,32.26
N$143  (via drill 1.02 pad 1.88)
  other vias: 27.18,29.72
N$144  (via drill 1.02 pad 1.88)
  other vias: 27.18,27.18
N$145  (via drill 1.02 pad 1.88)
  other vias: 27.18,24.64
N$146  (via drill 1.02 pad 1.88)
  other vias: 27.18,22.1
N$147  (via drill 1.02 pad 1.88)
  other vias: 27.18,19.56
N$148  (via drill 1.02 pad 1.88)
  other vias: 27.18,17.02
N$149
  Top 0.254: IC3.6 112.05,40.51 C11.2
N$150
  Top 0.254: IC4.5 112.34,22.48 112.65,22.17 112.65,19.93 C13.2
N$151
  Top 0.254: IC4.8 111.38,26.29 112.27,27.18 112.27,31.09 111.32,32.04 C14.2 R5.2
N$152  (via drill 1.02 pad 1.88)
  other vias: 29.72,50.04
N$153  (via drill 1.02 pad 1.88)
  other vias: 29.72,47.5
N$154  (via drill 1.02 pad 1.88)
  other vias: 29.72,44.96
N$155  (via drill 1.02 pad 1.88)
  other vias: 29.72,42.42
N$156  (via drill 1.02 pad 1.88)
  other vias: 29.72,39.88
N$157  (via drill 1.02 pad 1.88)
  other vias: 29.72,37.34
N$158  (via drill 1.02 pad 1.88)
  other vias: 29.72,34.8
N$159  (via drill 1.02 pad 1.88)
  other vias: 29.72,32.26
N$160  (via drill 1.02 pad 1.88)
  other vias: 29.72,29.72
N$161  (via drill 1.02 pad 1.88)
  other vias: 29.72,27.18
N$162  (via drill 1.02 pad 1.88)
  other vias: 29.72,24.64
N$163  (via drill 1.02 pad 1.88)
  other vias: 29.72,22.1
N$164  (via drill 1.02 pad 1.88)
  other vias: 29.72,19.56
N$165  (via drill 1.02 pad 1.88)
  other vias: 29.72,17.02
N$166  (via drill 1.02 pad 1.88)
  other vias: 9.4,52.58
N$167  (via drill 1.02 pad 1.88)
  other vias: 11.94,52.58
N$168  (via drill 1.02 pad 1.88)
  other vias: 14.48,52.58
N$169  (via drill 1.02 pad 1.88)
  other vias: 32.26,50.04
N$170  (via drill 1.02 pad 1.88)
  other vias: 32.26,47.5
N$171  (via drill 1.02 pad 1.88)
  other vias: 32.26,44.96
N$172  (via drill 1.02 pad 1.88)
  other vias: 32.26,42.42
N$173  (via drill 1.02 pad 1.88)
  other vias: 32.26,39.88
N$174  (via drill 1.02 pad 1.88)
  other vias: 32.26,37.34
N$175  (via drill 1.02 pad 1.88)
  other vias: 32.26,34.8
N$176  (via drill 1.02 pad 1.88)
  other vias: 32.26,32.26
N$177  (via drill 1.02 pad 1.88)
  other vias: 32.26,29.72
N$178  (via drill 1.02 pad 1.88)
  other vias: 32.26,27.18
N$179  (via drill 1.02 pad 1.88)
  other vias: 32.26,24.64
N$180  (via drill 1.02 pad 1.88)
  other vias: 32.26,22.1
N$181  (via drill 1.02 pad 1.88)
  other vias: 32.26,19.56
N$182  (via drill 1.02 pad 1.88)
  other vias: 32.26,17.02
N$183  (via drill 1.02 pad 1.88)
  other vias: 34.8,50.04
N$184  (via drill 1.02 pad 1.88)
  other vias: 34.8,47.5
N$185  (via drill 1.02 pad 1.88)
  other vias: 34.8,44.96
N$186  (via drill 1.02 pad 1.88)
  other vias: 34.8,42.42
N$187  (via drill 1.02 pad 1.88)
  other vias: 34.8,39.88
N$188  (via drill 1.02 pad 1.88)
  other vias: 34.8,37.34
N$189  (via drill 1.02 pad 1.88)
  other vias: 34.8,34.8
N$190  (via drill 1.02 pad 1.88)
  other vias: 34.8,32.26
N$191  (via drill 1.02 pad 1.88)
  other vias: 34.8,29.72
N$192  (via drill 1.02 pad 1.88)
  other vias: 34.8,27.18
N$193  (via drill 1.02 pad 1.88)
  other vias: 34.8,24.64
N$194  (via drill 1.02 pad 1.88)
  other vias: 34.8,22.1
N$195  (via drill 1.02 pad 1.88)
  other vias: 34.8,19.56
N$196  (via drill 1.02 pad 1.88)
  other vias: 34.8,17.02
N$197
  Top 0.254: IC4.6 113.31,23.75 116.08,26.52 C15.2
N$198
  Top 0.254: LED2.A R6.1
N$199
  Top 0.254: JP1.2 U2.D7
N$200
  Top 0.254: JP6.1 U2.D8
N$201
  Top 0.254: JP6.2 U2.D9
N$202
  Top 0.254: JP6.3 U2.D10
N$203
  Top 0.254: JP6.4 U2.D11
N$204
  Top 0.254: JP6.5 U2.D12
N$205
  Top 0.254: JP6.6 U2.D13
N$206  (via drill 1.02 pad 1.88)
  other vias: 74.17,50.04
N$207  (via drill 1.02 pad 1.88)
  other vias: 74.17,47.5
N$208  (via drill 1.02 pad 1.88)
  other vias: 74.17,44.96
N$209  (via drill 1.02 pad 1.88)
  other vias: 74.17,42.42
N$210  (via drill 1.02 pad 1.88)
  other vias: 74.17,39.88
N$211  (via drill 1.02 pad 1.88)
  other vias: 74.17,37.34
N$212  (via drill 1.02 pad 1.88)
  other vias: 74.17,34.8
N$213  (via drill 1.02 pad 1.88)
  other vias: 74.17,32.26
N$214  (via drill 1.02 pad 1.88)
  other vias: 74.17,29.72
N$215  (via drill 1.02 pad 1.88)
  other vias: 74.17,27.18
N$216  (via drill 1.02 pad 1.88)
  other vias: 74.17,24.64
N$217  (via drill 1.02 pad 1.88)
  other vias: 74.17,22.1
N$218  (via drill 1.02 pad 1.88)
  other vias: 74.17,19.56
N$219  (via drill 1.02 pad 1.88)
  other vias: 74.17,17.02
N$220  (via drill 1.02 pad 1.88)
  other vias: 74.17,14.48
N$221  (via drill 1.02 pad 1.88)
  other vias: 74.17,11.94
N$222  (via drill 1.02 pad 1.88)
  other vias: 74.17,9.4
N$223  (via drill 1.02 pad 1.88)
  other vias: 76.71,50.04
N$224  (via drill 1.02 pad 1.88)
  other vias: 76.71,47.5
N$225  (via drill 1.02 pad 1.88)
  other vias: 76.71,44.96
N$226  (via drill 1.02 pad 1.88)
  other vias: 76.71,42.42
N$227  (via drill 0.51)
  Top 0.254: S1.4 49.51,17.91 v49.43,17.98
  Bottom 0.254: U1.RES 30.99,10.67 32.26,11.94 44.07,11.94 49.43,17.3 v49.43,17.98
N$228  (via drill 1.02 pad 1.88)
  other vias: 76.71,39.88
N$229  (via drill 1.02 pad 1.88)
  other vias: 76.71,37.34
N$230  (via drill 1.02 pad 1.88)
  other vias: 76.71,34.8
N$231  (via drill 1.02 pad 1.88)
  other vias: 76.71,32.26
N$232  (via drill 1.02 pad 1.88)
  other vias: 76.71,29.72
N$233  (via drill 1.02 pad 1.88)
  other vias: 76.71,27.18
N$234  (via drill 1.02 pad 1.88)
  other vias: 76.71,24.64
N$235  (via drill 1.02 pad 1.88)
  other vias: 76.71,22.1
N$236  (via drill 1.02 pad 1.88)
  other vias: 76.71,19.56
N$237  (via drill 1.02 pad 1.88)
  other vias: 76.71,17.02
N$238  (via drill 1.02 pad 1.88)
  other vias: 76.71,14.48
N$239  (via drill 1.02 pad 1.88)
  other vias: 76.71,11.94
N$240  (via drill 1.02 pad 1.88)
  other vias: 76.71,9.4
N$241  (via drill 1.02 pad 1.88)
  other vias: 79.25,50.04
N$242  (via drill 1.02 pad 1.88)
  other vias: 79.25,47.5
N$243  (via drill 1.02 pad 1.88)
  other vias: 79.25,44.96
N$244  (via drill 1.02 pad 1.88)
  other vias: 79.25,42.42
N$245  (via drill 1.02 pad 1.88)
  other vias: 79.25,39.88
N$246  (via drill 1.02 pad 1.88)
  other vias: 79.25,37.34
N$247  (via drill 1.02 pad 1.88)
  other vias: 79.25,34.8
N$248  (via drill 1.02 pad 1.88)
  other vias: 79.25,32.26
N$249  (via drill 1.02 pad 1.88)
  other vias: 79.25,29.72
N$250  (via drill 1.02 pad 1.88)
  other vias: 79.25,27.18
N$251  (via drill 1.02 pad 1.88)
  other vias: 79.25,24.64
N$252  (via drill 1.02 pad 1.88)
  other vias: 79.25,22.1
N$253  (via drill 1.02 pad 1.88)
  other vias: 79.25,19.56
N$254  (via drill 1.02 pad 1.88)
  other vias: 79.25,17.02
N$255  (via drill 1.02 pad 1.88)
  other vias: 79.25,14.48
N$256  (via drill 1.02 pad 1.88)
  other vias: 79.25,11.94
N$257  (via drill 1.02 pad 1.88)
  other vias: 79.25,9.4
N$258  (via drill 1.02 pad 1.88)
  other vias: 81.79,50.04
N$259  (via drill 1.02 pad 1.88)
  other vias: 81.79,47.5
N$260  (via drill 1.02 pad 1.88)
  other vias: 81.79,44.96
N$261  (via drill 1.02 pad 1.88)
  other vias: 81.79,42.42
N$262  (via drill 1.02 pad 1.88)
  other vias: 81.79,39.88
N$263  (via drill 1.02 pad 1.88)
  other vias: 81.79,37.34
N$264  (via drill 1.02 pad 1.88)
  other vias: 81.79,34.8
N$265  (via drill 1.02 pad 1.88)
  other vias: 81.79,32.26
N$266  (via drill 1.02 pad 1.88)
  other vias: 81.79,29.72
N$267  (via drill 1.02 pad 1.88)
  other vias: 81.79,27.18
N$268  (via drill 1.02 pad 1.88)
  other vias: 81.79,24.64
N$269  (via drill 1.02 pad 1.88)
  other vias: 81.79,22.1
N$270  (via drill 1.02 pad 1.88)
  other vias: 81.79,19.56
N$271  (via drill 1.02 pad 1.88)
  other vias: 81.79,17.02
N$272  (via drill 1.02 pad 1.88)
  other vias: 81.79,14.48
N$273  (via drill 1.02 pad 1.88)
  other vias: 81.79,11.94
N$274  (via drill 1.02 pad 1.88)
  other vias: 81.79,9.4
N$275  (via drill 1.02 pad 1.88)
  other vias: 84.33,50.04
N$276  (via drill 1.02 pad 1.88)
  other vias: 84.33,47.5
N$277  (via drill 1.02 pad 1.88)
  other vias: 84.33,44.96
N$278  (via drill 1.02 pad 1.88)
  other vias: 84.33,42.42
N$279  (via drill 1.02 pad 1.88)
  other vias: 84.33,39.88
N$280  (via drill 1.02 pad 1.88)
  other vias: 84.33,37.34
N$281  (via drill 1.02 pad 1.88)
  other vias: 84.33,34.8
N$282  (via drill 1.02 pad 1.88)
  other vias: 84.33,32.26
N$283  (via drill 1.02 pad 1.88)
  other vias: 84.33,29.72
N$284  (via drill 1.02 pad 1.88)
  other vias: 84.33,27.18
N$285  (via drill 1.02 pad 1.88)
  other vias: 84.33,24.64
N$286  (via drill 1.02 pad 1.88)
  other vias: 84.33,22.1
N$287  (via drill 1.02 pad 1.88)
  other vias: 84.33,19.56
N$288  (via drill 1.02 pad 1.88)
  other vias: 84.33,17.02
N$289  (via drill 1.02 pad 1.88)
  other vias: 84.33,14.48
N$290  (via drill 1.02 pad 1.88)
  other vias: 84.33,11.94
N$291  (via drill 1.02 pad 1.88)
  other vias: 84.33,9.4
N$292  (via drill 1.02 pad 1.88)
  other vias: 86.87,50.04
N$293  (via drill 1.02 pad 1.88)
  other vias: 86.87,47.5
N$294  (via drill 1.02 pad 1.88)
  other vias: 86.87,44.96
N$295  (via drill 1.02 pad 1.88)
  other vias: 86.87,42.42
N$296  (via drill 1.02 pad 1.88)
  other vias: 86.87,39.88
N$297  (via drill 1.02 pad 1.88)
  other vias: 86.87,37.34
N$298  (via drill 1.02 pad 1.88)
  other vias: 86.87,34.8
N$299  (via drill 1.02 pad 1.88)
  other vias: 86.87,32.26
N$300  (via drill 1.02 pad 1.88)
  other vias: 86.87,29.72
N$301  (via drill 1.02 pad 1.88)
  other vias: 86.87,27.18
N$302  (via drill 1.02 pad 1.88)
  other vias: 86.87,24.64
N$303  (via drill 1.02 pad 1.88)
  other vias: 86.87,22.1
N$304  (via drill 1.02 pad 1.88)
  other vias: 86.87,19.56
N$305  (via drill 1.02 pad 1.88)
  other vias: 86.87,17.02
N$306  (via drill 1.02 pad 1.88)
  other vias: 86.87,14.48
N$307  (via drill 1.02 pad 1.88)
  other vias: 86.87,11.94
N$308  (via drill 1.02 pad 1.88)
  other vias: 86.87,9.4
N$309  (via drill 1.02 pad 1.88)
  other vias: 89.41,50.04
N$310  (via drill 1.02 pad 1.88)
  other vias: 89.41,47.5
N$311  (via drill 1.02 pad 1.88)
  other vias: 89.41,44.96
N$312  (via drill 1.02 pad 1.88)
  other vias: 89.41,42.42
N$313  (via drill 1.02 pad 1.88)
  other vias: 89.41,39.88
N$314  (via drill 1.02 pad 1.88)
  other vias: 89.41,37.34
N$315  (via drill 1.02 pad 1.88)
  other vias: 89.41,34.8
N$316  (via drill 1.02 pad 1.88)
  other vias: 89.41,32.26
N$317  (via drill 1.02 pad 1.88)
  other vias: 89.41,29.72
N$318  (via drill 1.02 pad 1.88)
  other vias: 89.41,27.18
N$319  (via drill 1.02 pad 1.88)
  other vias: 89.41,24.64
N$320  (via drill 1.02 pad 1.88)
  other vias: 89.41,22.1
N$321  (via drill 1.02 pad 1.88)
  other vias: 89.41,19.56
N$322  (via drill 1.02 pad 1.88)
  other vias: 89.41,17.02
N$323  (via drill 1.02 pad 1.88)
  other vias: 89.41,14.48
N$324  (via drill 1.02 pad 1.88)
  other vias: 89.41,11.94
N$325  (via drill 1.02 pad 1.88)
  other vias: 91.95,50.04
N$326  (via drill 1.02 pad 1.88)
  other vias: 91.95,47.5
N$327  (via drill 1.02 pad 1.88)
  other vias: 91.95,44.96
N$328  (via drill 1.02 pad 1.88)
  other vias: 91.95,42.42
N$329  (via drill 1.02 pad 1.88)
  other vias: 91.95,39.88
N$330  (via drill 1.02 pad 1.88)
  other vias: 91.95,37.34
N$331  (via drill 1.02 pad 1.88)
  other vias: 91.95,34.8
N$332  (via drill 1.02 pad 1.88)
  other vias: 91.95,32.26
N$333  (via drill 1.02 pad 1.88)
  other vias: 91.95,29.72
N$334  (via drill 1.02 pad 1.88)
  other vias: 91.95,27.18
N$335  (via drill 1.02 pad 1.88)
  other vias: 91.95,24.64
N$336  (via drill 1.02 pad 1.88)
  other vias: 91.95,22.1
N$337  (via drill 1.02 pad 1.88)
  other vias: 91.95,19.56
N$338  (via drill 1.02 pad 1.88)
  other vias: 91.95,17.02
N$339  (via drill 1.02 pad 1.88)
  other vias: 94.49,50.04
N$340  (via drill 1.02 pad 1.88)
  other vias: 94.49,47.5
N$341  (via drill 1.02 pad 1.88)
  other vias: 94.49,44.96
N$342  (via drill 1.02 pad 1.88)
  other vias: 94.49,42.42
N$343  (via drill 1.02 pad 1.88)
  other vias: 94.49,39.88
N$344  (via drill 1.02 pad 1.88)
  other vias: 94.49,37.34
N$345  (via drill 1.02 pad 1.88)
  other vias: 94.49,34.8
N$346  (via drill 1.02 pad 1.88)
  other vias: 94.49,32.26
N$347  (via drill 1.02 pad 1.88)
  other vias: 94.49,29.72
N$348  (via drill 1.02 pad 1.88)
  other vias: 94.49,27.18
N$349  (via drill 1.02 pad 1.88)
  other vias: 94.49,24.64
N$350  (via drill 1.02 pad 1.88)
  other vias: 94.49,22.1
N$351  (via drill 1.02 pad 1.88)
  other vias: 94.49,19.56
N$352  (via drill 1.02 pad 1.88)
  other vias: 94.49,17.02
N$353  (via drill 1.02 pad 1.88)
  other vias: 97.03,50.04
N$354  (via drill 1.02 pad 1.88)
  other vias: 97.03,47.5
N$355  (via drill 1.02 pad 1.88)
  other vias: 97.03,44.96
N$356  (via drill 1.02 pad 1.88)
  other vias: 97.03,42.42
N$357  (via drill 1.02 pad 1.88)
  other vias: 97.03,39.88
N$358  (via drill 1.02 pad 1.88)
  other vias: 97.03,37.34
N$359  (via drill 1.02 pad 1.88)
  other vias: 97.03,34.8
N$360  (via drill 1.02 pad 1.88)
  other vias: 97.03,32.26
N$361  (via drill 1.02 pad 1.88)
  other vias: 97.03,29.72
N$362  (via drill 1.02 pad 1.88)
  other vias: 97.03,27.18
N$363  (via drill 1.02 pad 1.88)
  other vias: 97.03,24.64
N$364  (via drill 1.02 pad 1.88)
  other vias: 97.03,22.1
N$365  (via drill 1.02 pad 1.88)
  other vias: 97.03,19.56
N$366  (via drill 1.02 pad 1.88)
  other vias: 97.03,17.02
N$367  (via drill 1.02 pad 1.88)
  other vias: 99.57,50.04
N$368  (via drill 1.02 pad 1.88)
  other vias: 99.57,47.5
N$369  (via drill 1.02 pad 1.88)
  other vias: 99.57,44.96
N$370  (via drill 1.02 pad 1.88)
  other vias: 99.57,42.42
N$371  (via drill 1.02 pad 1.88)
  other vias: 99.57,39.88
N$372  (via drill 1.02 pad 1.88)
  other vias: 99.57,37.34
N$373  (via drill 1.02 pad 1.88)
  other vias: 99.57,34.8
N$374  (via drill 1.02 pad 1.88)
  other vias: 99.57,32.26
N$375  (via drill 1.02 pad 1.88)
  other vias: 99.57,29.72
N$376  (via drill 1.02 pad 1.88)
  other vias: 99.57,27.18
N$377  (via drill 1.02 pad 1.88)
  other vias: 99.57,24.64
N$378  (via drill 1.02 pad 1.88)
  other vias: 99.57,22.1
N$379  (via drill 1.02 pad 1.88)
  other vias: 99.57,19.56
N$380  (via drill 1.02 pad 1.88)
  other vias: 99.57,17.02
N$381  (via drill 1.02 pad 1.88)
  other vias: 74.17,52.58
N$382  (via drill 1.02 pad 1.88)
  other vias: 76.71,52.58
N$383  (via drill 1.02 pad 1.88)
  other vias: 79.25,52.58
N$384  (via drill 0.51)
  Top 0.254: S2.4 114.28,17.91 v114.2,17.98
  Bottom 0.254: U2.RES 95.76,10.67 97.03,11.94 108.84,11.94 114.2,17.3 v114.2,17.98
N$385
  Top 0.254: IC5.5 47.87,93.09 C17.2
N$386
  Top 0.254: R7.2 43.63,102.25 45.4,102.25 C18.2 46.86,102.43 47.5,101.8 47.5,97.54 46.86,96.9 IC5.8
N$387
  Top 0.254: IC5.6 47.28,94.36 C19.2
N$388
  Top 0.254: IC6.5 47.57,76.33 47.88,76.02 47.88,73.78 C21.2
N$389
  Top 0.254: IC6.8 46.61,80.14 47.5,81.03 47.5,84.94 46.55,85.89 C22.2 R8.2
N$390
  Top 0.254: IC6.6 48.54,77.6 51.31,80.37 C23.2
N$391
  Top 0.254: LED3.A R9.1
N$392
  Top 0.254: JP9.2 U3.D7
N$393
  Top 0.254: JP10.1 U3.D8
N$394
  Top 0.254: JP10.2 U3.D9
N$395
  Top 0.254: JP10.3 U3.D10
N$396
  Top 0.254: JP10.4 U3.D11
N$397
  Top 0.254: JP10.5 U3.D12
N$398
  Top 0.254: JP10.6 U3.D13
N$399  (via drill 1.02 pad 1.88)
  other vias: 9.4,103.89
N$400  (via drill 1.02 pad 1.88)
  other vias: 9.4,101.35
N$401  (via drill 1.02 pad 1.88)
  other vias: 9.4,98.81
N$402  (via drill 1.02 pad 1.88)
  other vias: 9.4,96.27
N$403  (via drill 1.02 pad 1.88)
  other vias: 9.4,93.73
N$404  (via drill 1.02 pad 1.88)
  other vias: 9.4,91.19
N$405  (via drill 1.02 pad 1.88)
  other vias: 9.4,88.65
N$406  (via drill 1.02 pad 1.88)
  other vias: 9.4,86.11
N$407  (via drill 1.02 pad 1.88)
  other vias: 9.4,83.57
N$408  (via drill 1.02 pad 1.88)
  other vias: 9.4,81.03
N$409  (via drill 1.02 pad 1.88)
  other vias: 9.4,78.49
N$410  (via drill 1.02 pad 1.88)
  other vias: 9.4,75.95
N$411  (via drill 1.02 pad 1.88)
  other vias: 9.4,73.41
N$412  (via drill 1.02 pad 1.88)
  other vias: 9.4,70.87
N$413  (via drill 1.02 pad 1.88)
  other vias: 9.4,68.33
N$414  (via drill 1.02 pad 1.88)
  other vias: 9.4,65.79
N$415  (via drill 1.02 pad 1.88)
  other vias: 9.4,63.25
N$416  (via drill 1.02 pad 1.88)
  other vias: 11.94,103.89
N$417  (via drill 1.02 pad 1.88)
  other vias: 11.94,101.35
N$418  (via drill 1.02 pad 1.88)
  other vias: 11.94,98.81
N$419  (via drill 1.02 pad 1.88)
  other vias: 11.94,96.27
N$420  (via drill 1.02 pad 1.88)
  other vias: 11.94,93.73
N$421  (via drill 1.02 pad 1.88)
  other vias: 11.94,91.19
N$422  (via drill 1.02 pad 1.88)
  other vias: 11.94,88.65
N$423  (via drill 1.02 pad 1.88)
  other vias: 11.94,86.11
N$424  (via drill 1.02 pad 1.88)
  other vias: 11.94,83.57
N$425  (via drill 1.02 pad 1.88)
  other vias: 11.94,81.03
N$426  (via drill 1.02 pad 1.88)
  other vias: 11.94,78.49
N$427  (via drill 1.02 pad 1.88)
  other vias: 11.94,75.95
N$428  (via drill 1.02 pad 1.88)
  other vias: 11.94,73.41
N$429  (via drill 1.02 pad 1.88)
  other vias: 11.94,70.87
N$430  (via drill 1.02 pad 1.88)
  other vias: 11.94,68.33
N$431  (via drill 1.02 pad 1.88)
  other vias: 11.94,65.79
N$432  (via drill 1.02 pad 1.88)
  other vias: 11.94,63.25
N$433  (via drill 1.02 pad 1.88)
  other vias: 14.48,103.89
N$434  (via drill 1.02 pad 1.88)
  other vias: 14.48,101.35
N$435  (via drill 1.02 pad 1.88)
  other vias: 14.48,98.81
N$436  (via drill 1.02 pad 1.88)
  other vias: 14.48,96.27
N$437  (via drill 1.02 pad 1.88)
  other vias: 14.48,93.73
N$438  (via drill 1.02 pad 1.88)
  other vias: 14.48,91.19
N$439  (via drill 1.02 pad 1.88)
  other vias: 14.48,88.65
N$440  (via drill 1.02 pad 1.88)
  other vias: 14.48,86.11
N$441  (via drill 1.02 pad 1.88)
  other vias: 14.48,83.57
N$442  (via drill 1.02 pad 1.88)
  other vias: 14.48,81.03
N$443  (via drill 1.02 pad 1.88)
  other vias: 14.48,78.49
N$444  (via drill 1.02 pad 1.88)
  other vias: 14.48,75.95
N$445  (via drill 1.02 pad 1.88)
  other vias: 14.48,73.41
N$446  (via drill 1.02 pad 1.88)
  other vias: 14.48,70.87
N$447  (via drill 1.02 pad 1.88)
  other vias: 14.48,68.33
N$448  (via drill 1.02 pad 1.88)
  other vias: 14.48,65.79
N$449  (via drill 1.02 pad 1.88)
  other vias: 14.48,63.25
N$450  (via drill 1.02 pad 1.88)
  other vias: 17.02,103.89
N$451  (via drill 1.02 pad 1.88)
  other vias: 17.02,101.35
N$452  (via drill 1.02 pad 1.88)
  other vias: 17.02,98.81
N$453  (via drill 1.02 pad 1.88)
  other vias: 17.02,96.27
N$454  (via drill 1.02 pad 1.88)
  other vias: 17.02,93.73
N$455  (via drill 1.02 pad 1.88)
  other vias: 17.02,91.19
N$456  (via drill 1.02 pad 1.88)
  other vias: 17.02,88.65
N$457  (via drill 1.02 pad 1.88)
  other vias: 17.02,86.11
N$458  (via drill 1.02 pad 1.88)
  other vias: 17.02,83.57
N$459  (via drill 1.02 pad 1.88)
  other vias: 17.02,81.03
N$460  (via drill 1.02 pad 1.88)
  other vias: 17.02,78.49
N$461  (via drill 1.02 pad 1.88)
  other vias: 17.02,75.95
N$462  (via drill 1.02 pad 1.88)
  other vias: 17.02,73.41
N$463  (via drill 1.02 pad 1.88)
  other vias: 17.02,70.87
N$464  (via drill 1.02 pad 1.88)
  other vias: 17.02,68.33
N$465  (via drill 1.02 pad 1.88)
  other vias: 17.02,65.79
N$466  (via drill 1.02 pad 1.88)
  other vias: 17.02,63.25
N$467  (via drill 1.02 pad 1.88)
  other vias: 19.56,103.89
N$468  (via drill 1.02 pad 1.88)
  other vias: 19.56,101.35
N$469  (via drill 1.02 pad 1.88)
  other vias: 19.56,98.81
N$470  (via drill 1.02 pad 1.88)
  other vias: 19.56,96.27
N$471  (via drill 1.02 pad 1.88)
  other vias: 19.56,93.73
N$472  (via drill 1.02 pad 1.88)
  other vias: 19.56,91.19
N$473  (via drill 1.02 pad 1.88)
  other vias: 19.56,88.65
N$474  (via drill 1.02 pad 1.88)
  other vias: 19.56,86.11
N$475  (via drill 1.02 pad 1.88)
  other vias: 19.56,83.57
N$476  (via drill 1.02 pad 1.88)
  other vias: 19.56,81.03
N$477  (via drill 1.02 pad 1.88)
  other vias: 19.56,78.49
N$478  (via drill 1.02 pad 1.88)
  other vias: 19.56,75.95
N$479  (via drill 1.02 pad 1.88)
  other vias: 19.56,73.41
N$480  (via drill 1.02 pad 1.88)
  other vias: 19.56,70.87
N$481  (via drill 1.02 pad 1.88)
  other vias: 19.56,68.33
N$482  (via drill 1.02 pad 1.88)
  other vias: 19.56,65.79
N$483  (via drill 1.02 pad 1.88)
  other vias: 19.56,63.25
N$484  (via drill 1.02 pad 1.88)
  other vias: 22.1,103.89
N$485  (via drill 1.02 pad 1.88)
  other vias: 22.1,101.35
N$486  (via drill 1.02 pad 1.88)
  other vias: 22.1,98.81
N$487  (via drill 1.02 pad 1.88)
  other vias: 22.1,96.27
N$488  (via drill 1.02 pad 1.88)
  other vias: 22.1,93.73
N$489  (via drill 1.02 pad 1.88)
  other vias: 22.1,91.19
N$490  (via drill 1.02 pad 1.88)
  other vias: 22.1,88.65
N$491  (via drill 1.02 pad 1.88)
  other vias: 22.1,86.11
N$492  (via drill 1.02 pad 1.88)
  other vias: 22.1,83.57
N$493  (via drill 1.02 pad 1.88)
  other vias: 22.1,81.03
N$494  (via drill 1.02 pad 1.88)
  other vias: 22.1,78.49
N$495  (via drill 1.02 pad 1.88)
  other vias: 22.1,75.95
N$496  (via drill 1.02 pad 1.88)
  other vias: 22.1,73.41
N$497  (via drill 1.02 pad 1.88)
  other vias: 22.1,70.87
N$498  (via drill 1.02 pad 1.88)
  other vias: 22.1,68.33
N$499  (via drill 1.02 pad 1.88)
  other vias: 22.1,65.79
N$500  (via drill 1.02 pad 1.88)
  other vias: 22.1,63.25
N$501  (via drill 1.02 pad 1.88)
  other vias: 24.64,103.89
N$502  (via drill 1.02 pad 1.88)
  other vias: 24.64,101.35
N$503  (via drill 1.02 pad 1.88)
  other vias: 24.64,98.81
N$504  (via drill 1.02 pad 1.88)
  other vias: 24.64,96.27
N$505  (via drill 1.02 pad 1.88)
  other vias: 24.64,93.73
N$506  (via drill 1.02 pad 1.88)
  other vias: 24.64,91.19
N$507  (via drill 1.02 pad 1.88)
  other vias: 24.64,88.65
N$508  (via drill 1.02 pad 1.88)
  other vias: 24.64,86.11
N$509  (via drill 1.02 pad 1.88)
  other vias: 24.64,83.57
N$510  (via drill 1.02 pad 1.88)
  other vias: 24.64,81.03
N$511  (via drill 1.02 pad 1.88)
  other vias: 24.64,78.49
N$512  (via drill 1.02 pad 1.88)
  other vias: 24.64,75.95
N$513  (via drill 1.02 pad 1.88)
  other vias: 24.64,73.41
N$514  (via drill 1.02 pad 1.88)
  other vias: 24.64,70.87
N$515  (via drill 1.02 pad 1.88)
  other vias: 24.64,68.33
N$516  (via drill 1.02 pad 1.88)
  other vias: 24.64,65.79
N$517  (via drill 1.02 pad 1.88)
  other vias: 27.18,103.89
N$518  (via drill 1.02 pad 1.88)
  other vias: 27.18,101.35
N$519  (via drill 1.02 pad 1.88)
  other vias: 27.18,98.81
N$520  (via drill 1.02 pad 1.88)
  other vias: 27.18,96.27
N$521  (via drill 1.02 pad 1.88)
  other vias: 27.18,93.73
N$522  (via drill 1.02 pad 1.88)
  other vias: 27.18,91.19
N$523  (via drill 1.02 pad 1.88)
  other vias: 27.18,88.65
N$524  (via drill 1.02 pad 1.88)
  other vias: 27.18,86.11
N$525  (via drill 1.02 pad 1.88)
  other vias: 27.18,83.57
N$526  (via drill 1.02 pad 1.88)
  other vias: 27.18,81.03
N$527  (via drill 1.02 pad 1.88)
  other vias: 27.18,78.49
N$528  (via drill 1.02 pad 1.88)
  other vias: 27.18,75.95
N$529  (via drill 1.02 pad 1.88)
  other vias: 27.18,73.41
N$530  (via drill 1.02 pad 1.88)
  other vias: 27.18,70.87
N$531  (via drill 1.02 pad 1.88)
  other vias: 29.72,103.89
N$532  (via drill 1.02 pad 1.88)
  other vias: 29.72,101.35
N$533  (via drill 1.02 pad 1.88)
  other vias: 29.72,98.81
N$534  (via drill 1.02 pad 1.88)
  other vias: 29.72,96.27
N$535  (via drill 1.02 pad 1.88)
  other vias: 29.72,93.73
N$536  (via drill 1.02 pad 1.88)
  other vias: 29.72,91.19
N$537  (via drill 1.02 pad 1.88)
  other vias: 29.72,88.65
N$538  (via drill 1.02 pad 1.88)
  other vias: 29.72,86.11
N$539  (via drill 1.02 pad 1.88)
  other vias: 29.72,83.57
N$540  (via drill 1.02 pad 1.88)
  other vias: 29.72,81.03
N$541  (via drill 1.02 pad 1.88)
  other vias: 29.72,78.49
N$542  (via drill 1.02 pad 1.88)
  other vias: 29.72,75.95
N$543  (via drill 1.02 pad 1.88)
  other vias: 29.72,73.41
N$544  (via drill 1.02 pad 1.88)
  other vias: 29.72,70.87
N$545  (via drill 1.02 pad 1.88)
  other vias: 32.26,103.89
N$546  (via drill 1.02 pad 1.88)
  other vias: 32.26,101.35
N$547  (via drill 1.02 pad 1.88)
  other vias: 32.26,98.81
N$548  (via drill 1.02 pad 1.88)
  other vias: 32.26,96.27
N$549  (via drill 1.02 pad 1.88)
  other vias: 32.26,93.73
N$550  (via drill 1.02 pad 1.88)
  other vias: 32.26,91.19
N$551  (via drill 1.02 pad 1.88)
  other vias: 32.26,88.65
N$552  (via drill 1.02 pad 1.88)
  other vias: 32.26,86.11
N$553  (via drill 1.02 pad 1.88)
  other vias: 32.26,83.57
N$554  (via drill 1.02 pad 1.88)
  other vias: 32.26,81.03
N$555  (via drill 1.02 pad 1.88)
  other vias: 32.26,78.49
N$556  (via drill 1.02 pad 1.88)
  other vias: 32.26,75.95
N$557  (via drill 1.02 pad 1.88)
  other vias: 32.26,73.41
N$558  (via drill 1.02 pad 1.88)
  other vias: 32.26,70.87
N$559  (via drill 1.02 pad 1.88)
  other vias: 34.8,103.89
N$560  (via drill 1.02 pad 1.88)
  other vias: 34.8,101.35
N$561  (via drill 1.02 pad 1.88)
  other vias: 34.8,98.81
N$562  (via drill 1.02 pad 1.88)
  other vias: 34.8,96.27
N$563  (via drill 1.02 pad 1.88)
  other vias: 34.8,93.73
N$564  (via drill 1.02 pad 1.88)
  other vias: 34.8,91.19
N$565  (via drill 1.02 pad 1.88)
  other vias: 34.8,88.65
N$566  (via drill 1.02 pad 1.88)
  other vias: 34.8,86.11
N$567  (via drill 1.02 pad 1.88)
  other vias: 34.8,83.57
N$568  (via drill 1.02 pad 1.88)
  other vias: 34.8,81.03
N$569  (via drill 1.02 pad 1.88)
  other vias: 34.8,78.49
N$570  (via drill 1.02 pad 1.88)
  other vias: 34.8,75.95
N$571  (via drill 1.02 pad 1.88)
  other vias: 34.8,73.41
N$572  (via drill 1.02 pad 1.88)
  other vias: 34.8,70.87
N$573  (via drill 1.02 pad 1.88)
  other vias: 9.4,106.43
N$574  (via drill 1.02 pad 1.88)
  other vias: 11.94,106.43
N$575  (via drill 1.02 pad 1.88)
  other vias: 14.48,106.43
N$576  (via drill 0.51)
  Top 0.254: S3.4 49.51,71.75 v49.43,71.83
  Bottom 0.254: U3.RES 30.99,64.52 32.26,65.79 44.07,65.79 49.43,71.14 v49.43,71.83
N$577
  Top 0.254: IC7.5 112.64,93.09 C25.2
N$578
  Top 0.254: R10.2 108.4,102.25 110.17,102.25 C26.2 111.63,102.43 112.27,101.8 112.27,97.54 111.63,96.9 IC7.8
N$579
  Top 0.254: IC7.6 112.05,94.36 C27.2
N$580
  Top 0.254: IC8.5 112.34,76.33 112.65,76.02 112.65,73.78 C29.2
N$581
  Top 0.254: IC8.8 111.38,80.14 112.27,81.03 112.27,84.94 111.32,85.89 C30.2 R11.2
N$582
  Top 0.254: IC8.6 113.31,77.6 116.08,80.37 C31.2
N$583
  Top 0.254: LED4.A R12.1
N$584
  Top 0.254: JP13.2 U4.D7
N$585
  Top 0.254: JP14.1 U4.D8
N$586
  Top 0.254: JP14.2 U4.D9
N$587
  Top 0.254: JP14.3 U4.D10
N$588
  Top 0.254: JP14.4 U4.D11
N$589
  Top 0.254: JP14.5 U4.D12
N$590
  Top 0.254: JP14.6 U4.D13
N$591  (via drill 1.02 pad 1.88)
  other vias: 74.17,103.89
N$592  (via drill 1.02 pad 1.88)
  other vias: 74.17,101.35
N$593  (via drill 1.02 pad 1.88)
  other vias: 74.17,98.81
N$594  (via drill 1.02 pad 1.88)
  other vias: 74.17,96.27
N$595  (via drill 1.02 pad 1.88)
  other vias: 74.17,93.73
N$596  (via drill 1.02 pad 1.88)
  other vias: 74.17,91.19
N$597  (via drill 1.02 pad 1.88)
  other vias: 74.17,88.65
N$598  (via drill 1.02 pad 1.88)
  other vias: 74.17,86.11
N$599  (via drill 1.02 pad 1.88)
  other vias: 74.17,83.57
N$600  (via drill 1.02 pad 1.88)
  other vias: 74.17,81.03
N$601  (via drill 1.02 pad 1.88)
  other vias: 74.17,78.49
N$602  (via drill 1.02 pad 1.88)
  other vias: 74.17,75.95
N$603  (via drill 1.02 pad 1.88)
  other vias: 74.17,73.41
N$604  (via drill 1.02 pad 1.88)
  other vias: 74.17,70.87
N$605  (via drill 1.02 pad 1.88)
  other vias: 74.17,68.33
N$606  (via drill 1.02 pad 1.88)
  other vias: 74.17,65.79
N$607  (via drill 1.02 pad 1.88)
  other vias: 74.17,63.25
N$608  (via drill 1.02 pad 1.88)
  other vias: 76.71,103.89
N$609  (via drill 1.02 pad 1.88)
  other vias: 76.71,101.35
N$610  (via drill 1.02 pad 1.88)
  other vias: 76.71,98.81
N$611  (via drill 1.02 pad 1.88)
  other vias: 76.71,96.27
N$612  (via drill 1.02 pad 1.88)
  other vias: 76.71,93.73
N$613  (via drill 1.02 pad 1.88)
  other vias: 76.71,91.19
N$614  (via drill 1.02 pad 1.88)
  other vias: 76.71,88.65
N$615  (via drill 1.02 pad 1.88)
  other vias: 76.71,86.11
N$616  (via drill 1.02 pad 1.88)
  other vias: 76.71,83.57